# Altium PCB BSafePCB.PcbDoc
Units mil, origin at the board's own origin, x right, y up, seen from the top; angles counter-clockwise.
Board outline 3430 x 2198 mil, 2 copper layers (Top Layer, Bottom Layer); 48 components, 47 nets, 230 pads, 40 vias.
Unrouted connection lines stored in the file: 12.
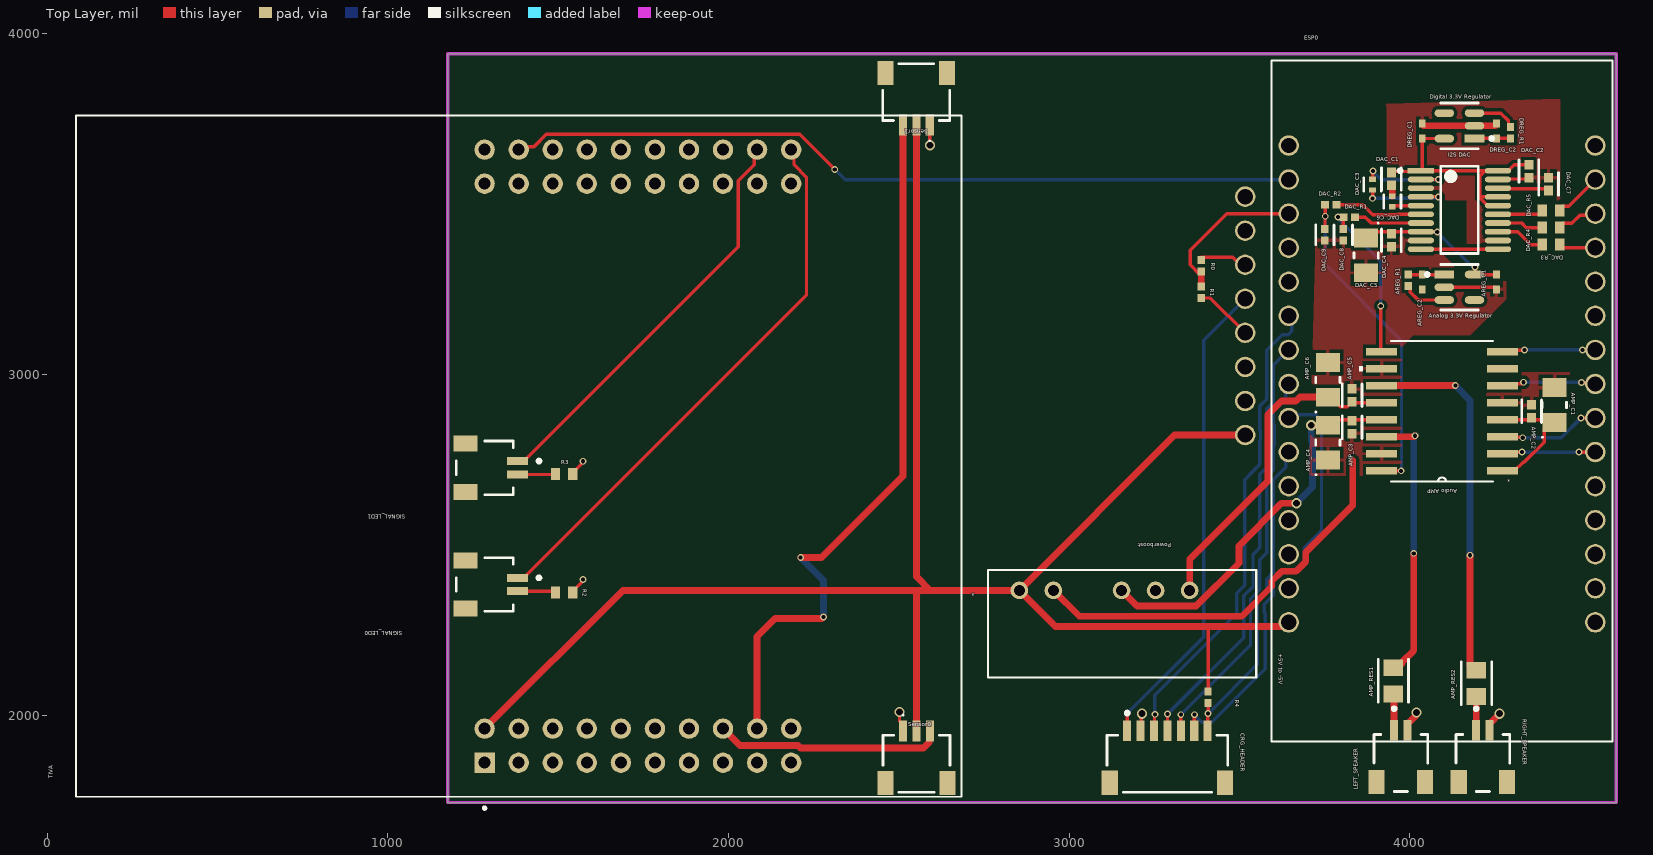
[diagram p0: Top Layer view]
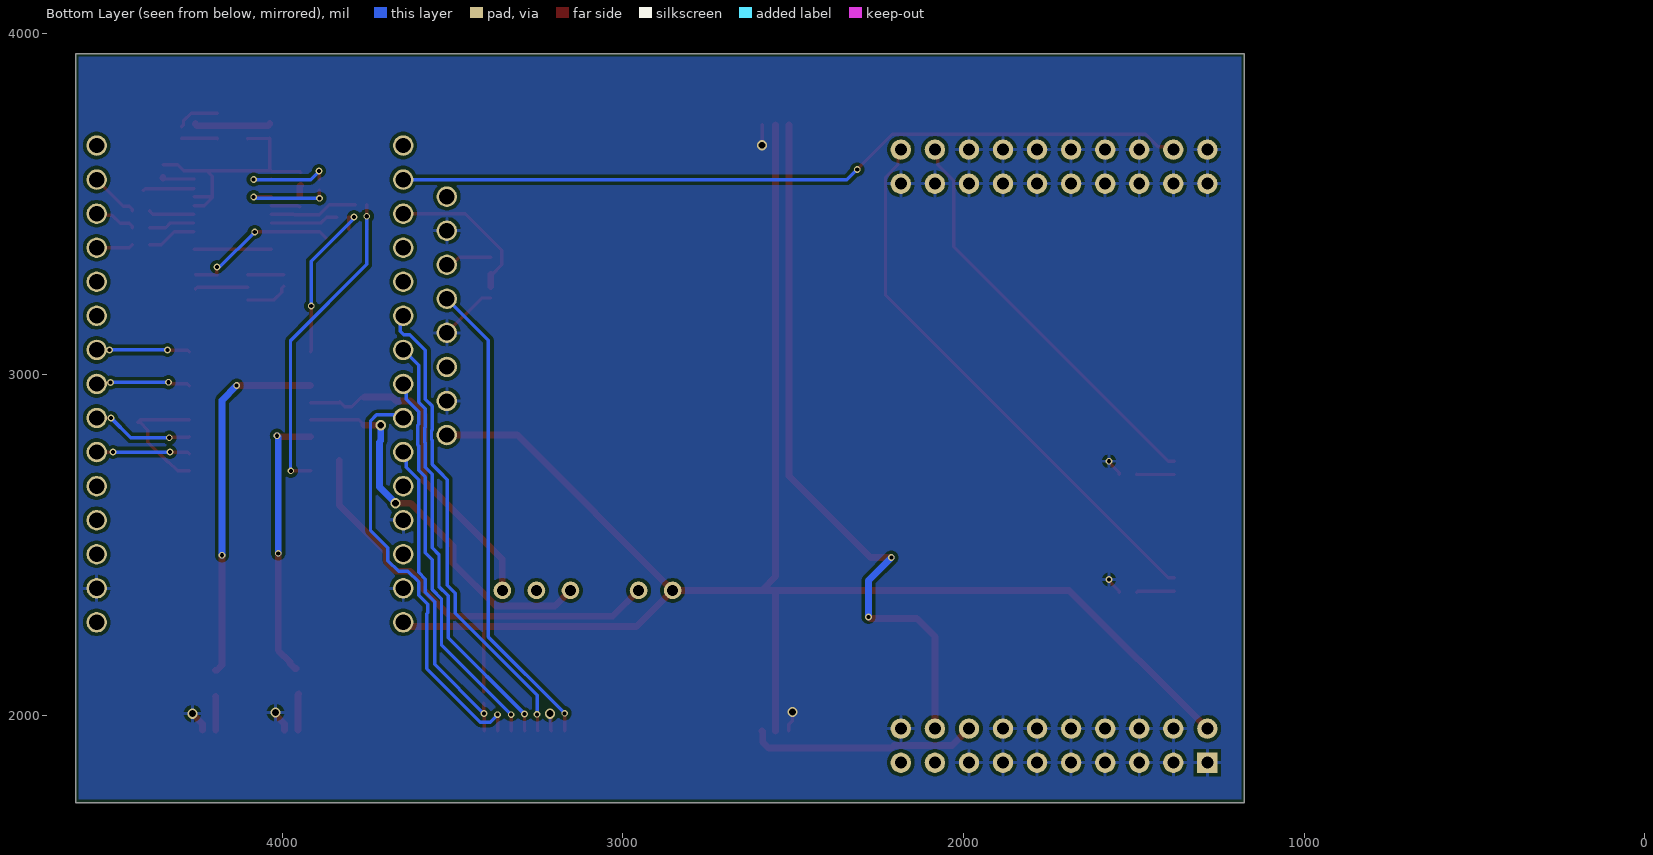
[diagram p1: Bottom Layer view, seen from below]
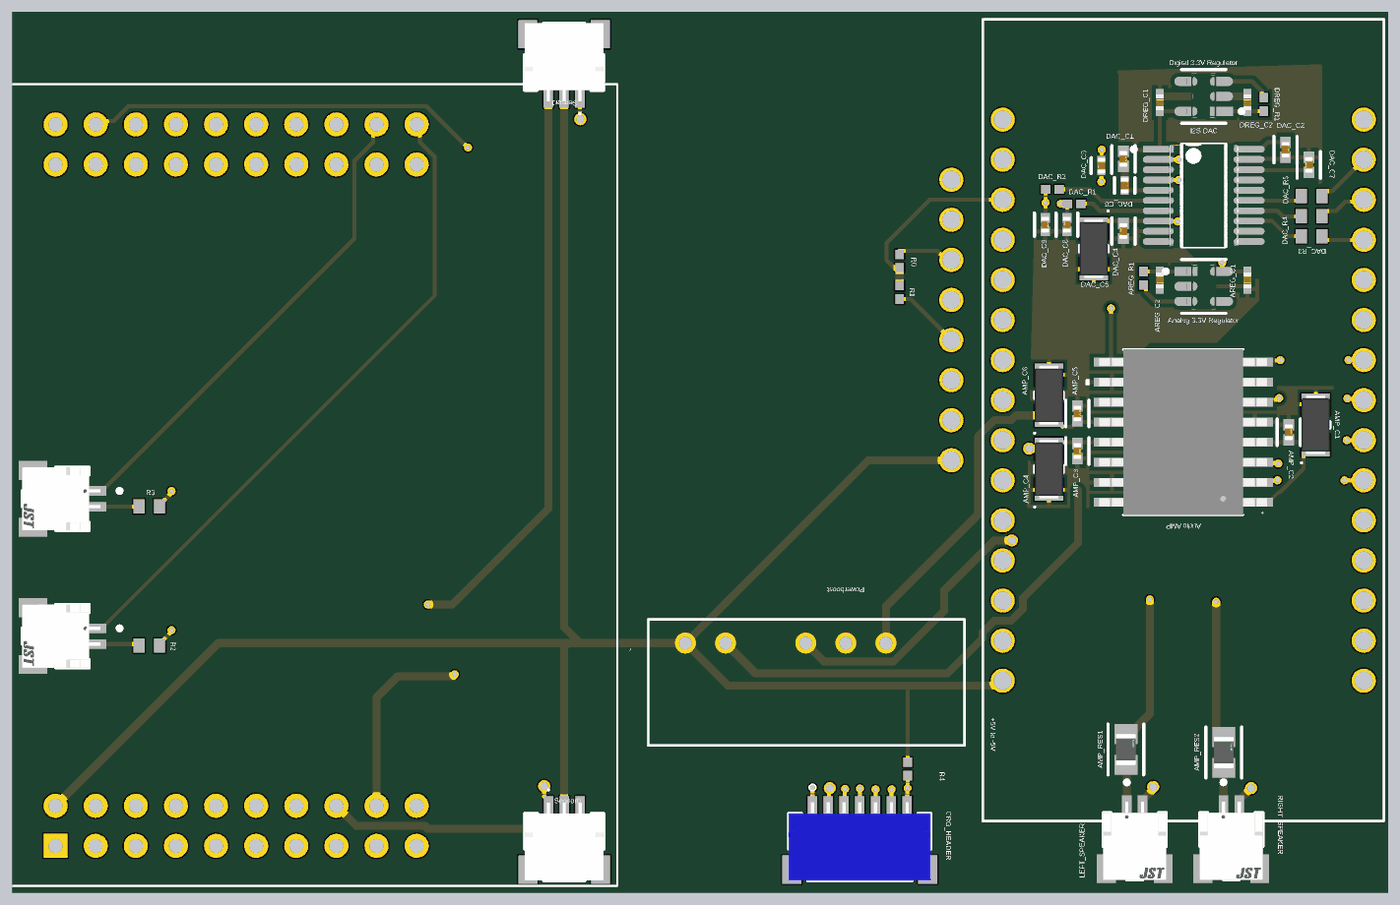
[diagram p2: 3D render of the assembled board from above, using the file's embedded part models]

## Layer stack, top to bottom
Top Solder: solder mask 0.4, Solder Resist, Dk 3.5
Top Layer: signal copper 1.4
Dielectric 1: dielectric 12.6, FR-4, Dk 4.8
Bottom Layer: signal copper 1.4
Bottom Solder: solder mask 0.4, Solder Resist, Dk 3.5

## Board outline
1176,1743 4606,1743 4606,3941 1176,3941

## Design rules (kind name [scope] priority, off if disabled: settings)
Clearance Clearance_1 [All] p1: gap=10 ignorepadtopadclearanceinfootprint=TRUE
Clearance [All] p2: gap=10 ignorepadtopadclearanceinfootprint=TRUE except(0: Arc-Hole Track-Hole SMDPad-Hole THPad-Hole Via-Hole Fill-Hole Poly-Hole Region-Hole Text-Hole)
PolygonConnect [All] p1: connectstyle=Relief reliefconductorwidth=10 reliefentries=4 polygonreliefangle="90 Angle" airgapwidth=10
RoutingVias [All] p1: holewidth=12 width=20 viastyle="Through Hole" minholewidth=12 minwidth=20 maxholewidth=28 maxwidth=50
SolderMaskExpansion [All] p1: expansion=4 istentingtop=FALSE
Width [All] p1: maxlimit=20 minlimit=10 preferedwidth=10
30 further rules are at their usual default settings.

## Classes and differential pairs
component class PGA: "+5V to -5V" AMP_C1 AMP_C2 AMP_C3 AMP_C4 AMP_C5 AMP_C6 AMP_RES1 AMP_RES2 "Audio AMP" LEFT_SPEAKER RIGHT_SPEAKER z
component class PCM: "Analog 3.3V Regulator" AREG_C1 AREG_C2 AREG_R1 DAC_C1 DAC_C2 DAC_C3 DAC_C4 DAC_C5 DAC_C6 DAC_C7 DAC_C8 DAC_C9 DAC_R1 DAC_R2 DAC_R3 DAC_R4 DAC_R5 "Digital 3.3V Regulator" DREG_C1 DREG_C2 DREG_R1 "I2S DAC" z
component class MAIN_SCH: CRG_HEADER ESP0 Powerboost R0 R1 R2 R3 R4 Sensor0 Sensor1 SIGNAL_LED0 SIGNAL_LED1 TIVA z

## Components (designator, comment, footprint, x,y, rotation, side; value= is the part's Value field where it differs from the comment)
"+5V to -5V" "TMH0505D" "TMH DUAL_TRP" 2854,2366 r0 top
AMP_C1 "TAJA106K016RNJ" CAPMP3217X18-T_V 4425,2910.18 r90 top locked value=10µF
AMP_C2 "CL05A104KA5NNNC" FP-CL278-IPC_A 4358,2891.84 r90 top locked value=100nF
AMP_C3 "CL05A104KA5NNNC" FP-CL278-IPC_A 3831,2845 r90 top locked value=100nF
AMP_C4 "TAJA106K016RNJ" CAPMP3217X18-T_V 3760,2799.82 r90 top locked value=10µF
AMP_C5 "CL05A104KA5NNNC" FP-CL278-IPC_A 3831,2938.84 r90 top locked value=100nF
AMP_C6 "TAJA106K016RNJ" CAPMP3217X18-T_V 3760,2984.18 r90 top locked value=10µF
AMP_RES1 "ESR10EZPJ560" FP-ESR10-IPC_A 3952,2100.46 r270 top value=56
AMP_RES2 "ESR10EZPJ560" FP-ESR10-IPC_A 4196,2093 r270 top value=56
"Analog 3.3V Regulator" "MIC5504-3.3YM5-TR" FP-SOT23-5LD-PL-1-IPC_B 4146,3255.87 r0 top locked
AREG_C1 "1uF 0402 Ceramic" CAP_CL05_SAM 4255,3271.11 r90 top locked value=1µF
AREG_C2 "1uF 0402 Ceramic" CAP_CL05_SAM 4037,3271.11 r90 top locked value=1µF
AREG_R1 "RC0402FR-07220KL" RESC1005X40X25NL05T10 3996,3276.14 r90 top locked
"Audio AMP" "PGA2311U" DW16 4095,2892 r180 top locked
CRG_HEADER "SM07B-SRSS-TB(LF)(SN)" JST-SM07B-SRSS-TB_V 3288.71,1877.28 r0 top
DAC_C1 "CL05A104KA5NNNC" FP-CL278-IPC_A 3946,3573.87 r90 top locked value=100nF
DAC_C2 "CL05A104KA5NNNC" FP-CL278-IPC_A 4350,3596.71 r90 top locked value=100nF
DAC_C3 "GRM155R61A225KE01J" FP-GRM155-0_05-MFG 3891,3557.12 r270 top locked value=2.2µF
DAC_C4 "CL05A104KA5NNNC" FP-CL278-IPC_A 3946,3394.03 r270 top locked value=100nF
DAC_C5 "TAJA106K016RNJ" CAPMP3217X18-T_V 3872,3349.69 r270 top locked value=10µF
DAC_C6 "GRM155R61A225KE01J" FP-GRM155-0_05-MFG 3949,3507.62 r90 top locked value=2.2µF
DAC_C7 "CL05A104KA5NNNC" FP-CL278-IPC_A 4408,3558.87 r270 top locked value=100nF
DAC_C8 "CL05B222JB5NNNC" FP-CL316-IPC_B 3805,3409.87 r270 top locked value=2.2nF
DAC_C9 "CL05B222JB5NNNC" FP-CL316-IPC_B 3751,3409.87 r90 top locked value=2.2nF
DAC_R1 "RC0402FR-07470RL" RESC1005X40X25NL05T10 3822.73,3461.87 r180 top locked
DAC_R2 "RC0402FR-07470RL" RESC1005X40X25NL05T10 3768.73,3497.87 r180 top locked
DAC_R3 "RK73B1JTTD221J" RESC1608X55X30LL20T10 4415,3380.87 r180 top locked value=220
DAC_R4 "RK73B1JTTD221J" RESC1608X55X30LL20T10 4415,3430.87 r180 top locked value=220
DAC_R5 "RK73B1JTTD221J" RESC1608X55X30LL20T10 4415,3480.87 r180 top locked value=220
"Digital 3.3V Regulator" "MIC5504-3.3YM5-TR" FP-SOT23-5LD-PL-1-IPC_B 4146,3729.87 r180 top locked
DREG_C1 "1uF 0402 Ceramic" CAP_CL05_SAM 4037,3714.64 r270 top locked value=1µF
DREG_C2 "1uF 0402 Ceramic" CAP_CL05_SAM 4255,3714.64 r270 top locked value=1µF
DREG_R1 "RC0402FR-07220KL" RESC1005X40X25NL05T10 4296,3709.87 r270 top locked
ESP0 "ESP-32-BB" ESP-32-BB-Footprint-1 3645,3672 r0 top
"I2S DAC" "PCM5102APWR" FP-PW0020A-IPC_A 4146,3482.87 r0 top locked
LEFT_SPEAKER "SM02B-SRSS-TB(LF)(SN)" FP-SM02B-SRSS-TB_LF_SN-0 3974,1859 r0 top
Powerboost "Powerboost 500c" "Powerboost 500c-Footprint-1" 3517,3522 r270 top locked
R0 "RC0402FR-07220KL" RESC1005X40X25NL05T10 3388,3319 r270 top value=220k
R1 "RC0402FR-0747KL" RESC1005X40X25NL05T10 3388,3241 r270 top value=47k
R2 "RK73B1JTTD221J" RESC1608X55X30LL20T10 1517.59,2360 r0 top value=220
R3 "RK73B1JTTD221J" RESC1608X55X30LL20T10 1517.59,2707 r0 top value=220
R4 "RC0402FR-0747KL" RESC1005X40X25NL05T10 3408,2052 r270 top value=47k
RIGHT_SPEAKER "SM02B-SRSS-TB(LF)(SN)" FP-SM02B-SRSS-TB_LF_SN-0 4214.87,1859.1 r0 top
Sensor0 "SM03B-SRSS-TB(LF)(SN)" JST-SM03B-SRSS-TB_V 2552,1857 r0 top
Sensor1 "SM03B-SRSS-TB(LF)(SN)" JST-SM03B-SRSS-TB_V 2551.55,3828.9 r180 top
SIGNAL_LED0 "SM02B-SRSS-TB(LF)(SN)" FP-SM02B-SRSS-TB_LF_SN-0 1284.1,2383.13 r270 top
SIGNAL_LED1 "SM02B-SRSS-TB(LF)(SN)" FP-SM02B-SRSS-TB_LF_SN-0 1284.1,2725.87 r270 top
TIVA "EK-TM4C123GXL" EK-TM4C123GXL-Footprint-1 1284,1860 r90 top locked

## Footprints (in the part's own frame and the unit in brackets; to place one, negate y for a bottom-side part, rotate by r counter-clockwise, add the part's x,y. Pads: shape width x height; smd on the part's side, far side on the other; paste and mask are expansions set on the pad)
CAP_CL05_SAM [mm]
  rect 0.606x0.5 smd paste+0 mask+0: 1(-0.553,0) 2(0.553,0)
  body extent -0.5,-0.25 0.5,0.25, height 0.55
CAPMP3217X18-T_V [mm] "Molded Capacitor, 2-Leads, Body 3.40x1.8mm"
  rect 1.4x1.8 smd: 1(-1.3,0) 2(1.3,0)
  silkscreen extent -2.45,-0.9 0.2,0.95, body extent -1.92,-0.9 1.92,0.9, height 1.8
DW16 [mil]
  rect 91x22 smd paste+0 mask+0: 1(-178,175) 2(-178,125) 3(-178,75) 4(-178,25) 5(-178,-25) 6(-178,-75) 7(-178,-125) 8(-178,-175) 9(178,-175) 10(178,-125) 11(178,-75) 12(178,-25) 13(178,25) 14(178,75) 15(178,125) 16(178,175)
  silkscreen extent -150,-207 244,207, body extent -209,-206 209,206, height 104
EK-TM4C123GXL-Footprint-1 [mm]
  rect 1.52x1.52 hole 0.89: J1_1(0,0)
  round 1.52 hole 0.89: J1_2(0,-2.54) J1_3(0,-5.08) J1_4(0,-7.62) J1_5(0,-10.16) J1_6(0,-12.7) J1_7(0,-15.24) J1_8(0,-17.78) J1_9(0,-20.32) J1_10(0,-22.86) J2_1(45.72,0) J2_2(45.72,-2.54) J2_3(45.72,-5.08) J2_4(45.72,-7.62) J2_5(45.72,-10.16) J2_6(45.72,-12.7) J2_7(45.72,-15.24) J2_8(45.72,-17.78) J2_9(45.72,-20.32) J2_10(45.72,-22.86) J3_1(2.54,0) J3_2(2.54,-2.54) J3_3(2.54,-5.08) J3_4(2.54,-7.62) J3_5(2.54,-10.16) J3_6(2.54,-12.7) J3_7(2.54,-15.24) J3_8(2.54,-17.78) J3_9(2.54,-20.32) J3_10(2.54,-22.86) J4_1(43.18,0) J4_2(43.18,-2.54) J4_3(43.18,-5.08) J4_4(43.18,-7.62) J4_5(43.18,-10.16) J4_6(43.18,-12.7) J4_7(43.18,-15.24) J4_8(43.18,-17.78) J4_9(43.18,-20.32) J4_10(43.18,-22.86)
  silkscreen extent -3.49,-35.56 48.26,30.48, body extent -5.97,-35.56 52.45,30.48, height 25.4
ESP-32-BB-Footprint-1 [mil]
  round 60 hole 45: 1(0,0) 2(0,-100) 3(0,-200) 4(0,-300) 5(0,-400) 6(0,-500) 7(0,-600) 8(0,-700) 9(0,-800) 10(0,-900) 11(0,-1000) 12(0,-1100) 13(0,-1200) 14(0,-1300) 15(0,-1400) 16(900,-1400) 17(900,-1300) 18(900,-1200) 19(900,-1100) 20(900,-1000) 21(900,-900) 22(900,-800) 23(900,-700) 24(900,-600) 25(900,-500) 26(900,-400) 27(900,-300) 28(900,-200) 29(900,-100) 30(900,0)
  silkscreen extent -50,-1750 950,250, body extent -50,-1750 950,250, height 488
FP-CL278-IPC_A [mil]
  rect 28.16x26.48 smd paste+0 mask+0: 1(-18.84,0) 2(18.84,0)
  silkscreen extent -33,-29 33,29, body extent -41,-21 41,21, height 10
FP-CL316-IPC_B [mil]
  rect 24.23x22.54 smd paste+0 mask+0: 1(-16.87,0) 2(16.87,0)
  silkscreen extent -29,-27 29,27, body extent -35,-17 35,17, height 10
FP-ESR10-IPC_A [mil]
  rect 49.53x57.56 smd paste+0 mask+0: 1(-38.46,0) 2(38.46,0)
  silkscreen extent -63,-45 63,45, body extent -83,-48 83,48, height 10
FP-GRM155-0_05-MFG [mm]
  rect 0.4x0.5 smd paste+0 mask+0: 1(-0.4,0) 2(0.4,0)
  silkscreen extent -0.5,-0.65 0.5,0.65, body extent -0.7,-0.38 0.7,0.38, height 0.25
FP-PW0020A-IPC_A [mm]
  rect 1.955x0.421 smd paste+0 mask+0: 1(-2.875,2.925)
  rrect100% 1.955x0.421 smd paste+0 mask+0: 2(-2.875,2.275) 3(-2.875,1.625) 4(-2.875,0.975) 5(-2.875,0.325) 6(-2.875,-0.325) 7(-2.875,-0.975) 8(-2.875,-1.625) 9(-2.875,-2.275) 10(-2.875,-2.925) 11(2.875,-2.925) 12(2.875,-2.275) 13(2.875,-1.625) 14(2.875,-0.975) 15(2.875,-0.325) 16(2.875,0.325) 17(2.875,0.975) 18(2.875,1.625) 19(2.875,2.275) 20(2.875,2.925)
  silkscreen extent -4.55,-3.25 1.4,3.25, body extent -4.35,-3.75 4.35,3.75, height 0.25
FP-SM02B-SRSS-TB_LF_SN-0 [mm]
  rect 0.6x1.55 smd paste+0 mask+0: 1(-0.5,2.45) 2(0.5,2.45)
  rect 1.2x1.8 smd paste+0 mask+0: 3(-1.8,-1.425) 4(1.8,-1.425)
  silkscreen extent -2,-2.12 2,4.17, body extent -2.5,-2.42 2.5,3.32, height 0.25
FP-SOT23-5LD-PL-1-IPC_B [mm]
  rect 1.456x0.57 smd paste+0 mask+0: 1(-1.125,0.95)
  rrect100% 1.456x0.57 smd paste+0 mask+0: 2(-1.125,0) 3(-1.125,-0.95) 4(1.125,-0.95) 5(1.125,0.95)
  silkscreen extent -2.53,-1.7 1.4,1.7, body extent -2.1,-1.7 2.1,1.7, height 0.25
JST-SM03B-SRSS-TB_V [mm] "SMD, 3-Leads, Body 5x4.25mm, Pitch 1mm"
  rect 0.6x1.55 smd: 1(-1,2.45) 2(0,2.45) 3(1,2.45)
  rect 1.2x1.8 smd: MP1(-2.3,-1.425) MP2(2.3,-1.425)
  silkscreen extent -2.5,-2.12 2.5,3.67, body extent -2.5,-2.12 2.5,2.83, height 3.25
JST-SM07B-SRSS-TB_V [mm] "SMD, 7-Leads, Body 9x4.25mm, Pitch 1mm"
  rect 0.6x1.55 smd: 1(-3,1.938) 2(-2,1.938) 3(-1,1.938) 4(0,1.938) 5(1,1.938) 6(2,1.938) 7(3,1.938)
  rect 1.2x1.8 smd: MP1(-4.3,-1.937) MP2(4.3,-1.937)
  silkscreen extent -4.5,-2.64 4.5,3.39, body extent -4.5,-2.64 4.5,2.31, height 2.96
"Powerboost 500c-Footprint-1" [mil]
  round 60 hole 45: 1(0,0) 2(100,0) 3(200,0) 4(300,0) 5(400,0) 6(500,0) 7(600,0) 8(700,0)
  body extent -400,-800 1000,50, height 550
RESC1005X40X25NL05T10 [mm] "Chip Resistor, 2-Leads, Body 1.00x0.50mm, IPC Medium Density"
  rect 0.6x0.55 smd: 1(-0.425,0) 2(0.425,0)
  body extent -0.53,-0.27 0.53,0.28, height 0.4
RESC1608X55X30LL20T10 [mm] "Chip Resistor, 2-Leads, Body 1.60x0.80mm, IPC High Density"
  rect 0.7x0.9 smd: 1(-0.65,0) 2(0.65,0)
  body extent -0.9,-0.5 0.9,0.5, height 0.55
"TMH DUAL_TRP" [mil]
  round 52 / inner round 60 / far side round 52 hole 32 paste-99999 mask+0: 1(0,0) 2(100,0) 4(300,0) 5(400,0) 6(500,0)
  silkscreen extent -92,-256 696,59, body extent -95,-260 700,60, height 400

## Part data
"+5V to -5V": library part CMP-019-00049-2, "DC-DC Regulated Power Supply Module, 2 Output, 2W, Hybrid", Max Operating Temperature=85°C, Min Operating Temperature=-40°C, RoHS Compliant=Yes
AMP_C1 AMP_C4 AMP_C6 DAC_C5: library part CMP-001-00041-7, "Standard Tantalum, 10 uF, +/- 10%, 16 V, -55 to 125 degC, 1206 (3216 Metric), RoHS, Tape and Reel", Capacitor Type=Tantalum, Case/Package=1206, Manufacturer=AVX, Max Operating Temperature=125°C, Min Operating Temperature=-55°C, Package Description="2-Pin Surface Mount Device, Body 3.2 x 1.65 mm", Package Quantity=1, Package Reference=CAPMP3217X18-T, Tolerance=10%, Voltage Rating=16V, Datasheet URL=http://datasheets.avx.com/TAJ.pdf, Datasheet Version=Feb-16, ESR=3Ohm, Manufacturer URL=http://www.avx.com/, Mounting Technology=SM, Package URL=http://www.avx.com/download/software/literature/AVX-Footprint-Library.pdf, Packaging=TapeandReel, Pins=2, RoHS Compliant=True
AMP_C2 AMP_C3 AMP_C5 DAC_C1 DAC_C2 DAC_C4 DAC_C7: library part CMP-001-00088-2, "Ceramic Capacitor, Multilayer, Ceramic, 25V, 10% +Tol, 10% -Tol, X5R, 15% TC, 0.1uF, Surface Mount, 0402, 0.1uF cap", Capacitor Type=Ceramic, Max Operating Temperature=85°C, Min Operating Temperature=-55°C, RoHS Compliant=Yes
AMP_RES1 AMP_RES2: library part CMP-009-00182-1, "Fixed Resistor, Metal Glaze/thick Film, 0.4W, 56ohm, 150V, 5% +/-Tol, 200ppm/Cel, Surface Mount, 0805", Max Operating Temperature=155°C, Min Operating Temperature=-55°C, Tolerance=5%, RoHS Compliant=Yes
"Analog 3.3V Regulator" "Digital 3.3V Regulator": library part CMP-019-00050-1, "Fixed Positive LDO Regulator, 3.3V, 0.38V Dropout, CMOS, PDSO5, use this one", RoHS Compliant=Yes
AREG_C1 AREG_C2 DREG_C1 DREG_C2: library part CMP-001-00089-6, "CL05A105KO5NNNC, Samsung, Ceramic CAP", Mfr_Name=Samsung, Design Item ID=CL05A105KO5NNNC, Source=CL05A105KO5NNNC.SchLib
AREG_R1 DREG_R1: library part CMP-009-00179-1, "Fixed Resistor, Metal Glaze/thick Film, 0.0625W, 220000ohm, 50V, 1% +/-Tol, 100ppm/Cel, Surface Mount, 0402", Max Operating Temperature=155°C, Min Operating Temperature=-55°C, Tolerance=1%, RoHS Compliant=Yes
"Audio AMP": library part CMP-005-000000-2, "No Description Available", Mfr_Name="Texas Instruments", Design Item ID=PGA2311U, RefDes=RefDes, Source=PGA2311U.SchLib, Type=Type
CRG_HEADER: library part CMP-002-00071-1, "CONN HEADER SH 7POS SIDE 1MM TIN", Pins=7
DAC_C3 DAC_C6: library part CMP-001-00090-1, "Ceramic Capacitor, Multilayer, Ceramic, 10V, 10% +Tol, 10% -Tol, X5R, 15% TC, 2.2uF, Surface Mount, 0402"
DAC_C8 DAC_C9: library part CMP-001-00087-2, "Ceramic Capacitor, Multilayer, Ceramic, 50V, 5% +Tol, 5% -Tol, X7R, 15% TC, 0.0022uF, Surface Mount, 0402, 2.2nF cap", Capacitor Type=Ceramic, Max Operating Temperature=125°C, Min Operating Temperature=-55°C, RoHS Compliant=Yes
DAC_R1 DAC_R2: library part CMP-009-00181-1, "Fixed Resistor, Metal Glaze/thick Film, 0.0625W, 470ohm, 50V, 1% +/-Tol, 100ppm/Cel, Surface Mount, 0402", Max Operating Temperature=155°C, Min Operating Temperature=-55°C, Tolerance=1%, RoHS Compliant=Yes
DAC_R3 DAC_R4 DAC_R5 R2 R3: library part CMP-009-00180-2, "Fixed Resistor, Metal Glaze/thick Film, 0.125W, 220ohm, 75V, 5% +/-Tol, 200ppm/Cel, Surface Mount, 0603", Max Operating Temperature=155°C, Min Operating Temperature=-55°C, Tolerance=5%, RoHS Compliant=Yes
ESP0: library part CMP-00001-11, "Breakoutboard for ESP-32-BB"
"I2S DAC": library part CMP-00027-00004-1, "D/A Converter, 1 Func, Serial Input Loading, PDSO20", Max Operating Temperature=85°C, Min Operating Temperature=-25°C, RoHS Compliant=Yes
LEFT_SPEAKER RIGHT_SPEAKER SIGNAL_LED0 SIGNAL_LED1: library part CMP-002-00072-1, "CONN HEADER SH 2POS SIDE 1MM TIN", Pins=2
Powerboost: library part CMP-00002-5, "Breakout board component for Adafruit Powerboost 500c"
R0: library part CMP-009-00179-2, "Fixed Resistor, Metal Glaze/thick Film, 0.0625W, 220000ohm, 50V, 1% +/-Tol, 100ppm/Cel, Surface Mount, 0402", Max Operating Temperature=155°C, Min Operating Temperature=-55°C, Tolerance=1%, RoHS Compliant=Yes
R1 R4: library part CMP-009-00178-2, "Fixed Resistor, Metal Glaze/thick Film, 0.0625W, 47000ohm, 50V, 1% +/-Tol, 100ppm/Cel, Surface Mount, 0402", Max Operating Temperature=155°C, Min Operating Temperature=-55°C, Tolerance=1%, RoHS Compliant=Yes
Sensor0 Sensor1: library part CMP-002-00074-1, "CONN HEADER SH 3POS SIDE 1MM TIN", Pins=3
TIVA: library part CMP-012-000000-3, "ARMÂ® CortexÂ®-M4F Based MCU TM4C123G LaunchPadâ„¢ Evaluation Kit", Package=None, Availability=Warning, Check_prices=https://www.snapeda.com/parts/EK-TM4C123GXL/Texas%20Instruments/view-part/132968/?ref=eda, Component Type=Standard, Design Item ID=EK-TM4C123GXL, MF="Texas Instruments", MP=EK-TM4C123GXL, Pin Count=40, Price=None, Purchase-URL=https://pricing.snapeda.com/search/part/EK-TM4C123GXL/?ref=eda, SnapEDA_Link=https://www.snapeda.com/parts/EK-TM4C123GXL/Texas%20Instruments/view-part/132968/?ref=snap, Source=EK-TM4C123GXL.SchLib

## Via types
v1: diameter 20, hole 12, Top Layer to Bottom Layer, 33 vias
v2: diameter 30, hole 20, Top Layer to Bottom Layer, 7 vias

## Nets (pads, with @x,y where several pads share a name; then routed paths per layer and width w, separated by ;. In a path a pad name is that pad's centre, name@x,y a point inside that pad or via, vN(x,y) a via of type N, cw(c..) or ccw(c..) an arc to the next point about the centre after c; other vN are vias at no path point)
5V: "+5V to -5V.1" "Audio AMP.1" "Audio AMP.4" "Digital 3.3V Regulator.1" AMP_C1.1 AMP_C2.1 DREG_C2.2 DREG_R1.2 ESP0.1 ESP0.15 Powerboost.8 R4.1 Sensor0.2 Sensor1.2 TIVA.J3_1 | length 5914.6
  Top Layer w10: R4.1 3408,2257 3411,2260 ; 4190.3,3692.47 4190.64,3692.81 4295.67,3692.81 DREG_R1.2 ; 4273,2717 4307.5,2717 4332.82,2742.32 4335.68,2742.32 4394.57,2801.21 4394.57,2836.44 4417.13,2859 AMP_C1.1 4417,2867 4273,2867
  Top Layer w20: TIVA.J3_1 1690,2366 2561,2366 ; Sensor1.2 2551.55,2406.45 2592,2366 ; Sensor0.2 2552,2357 2561,2366 ; Powerboost.8 3310,2822 2854,2366 ; ESP0.15 3634.18,2272 3622.18,2260 3411,2260 2960,2260 2854,2366 ; 2561,2366 2592,2366 ; 2592,2366 2854,2366
A3.3V: "Analog 3.3V Regulator.5" "I2S DAC.8" AREG_C1.2 DAC_C4.1 DAC_C5.1 | length 457.6
  Top Layer w10: DAC_C5.1 3890.02,3418.9 3946,3418.9 4032.8,3418.9 4033.24,3418.45 4080.55,3418.45 v1(4081,3418) ; v1(4192,3315) 4192,3294.57 4190.5,3293.07 4254.8,3293.07 AREG_C1.2
  Bottom Layer w10: v1(4081,3418) 4183.04,3315.96 4191.04,3315.96 v1(4192,3315)
A+5: "Analog 3.3V Regulator.1" AREG_C2.2 AREG_R1.2 | length 105.9
  Top Layer w10: AREG_R1.2 3996.2,3293.07 4101.5,3293.07 4101.7,3293.27
A+5V: "+5V to -5V.6" "Audio AMP.12" AMP_C5.1 AMP_C6.1 | length 984.2
  Top Layer w10: AMP_C6.1 3767.87,2933 3795.74,2905.13 3816.13,2905.13 3821.92,2910.92 3822.76,2910.92 3831,2919.16 AMP_C5.1 ; AMP_C5.1@3831,2917 3917,2917
  Top Layer w20: 3354,2366 3354,2457 3584,2687 3584,2881.71 3624.29,2922 3665.71,2922 3677.71,2934 3759,2934 AMP_C6.1
A-5V: "+5V to -5V.4" "Audio AMP.13" AMP_C3.2 AMP_C4.2 | length 1150.6
  Top Layer w10: AMP_C4.2 3776,2867 3917,2867
  Top Layer w20: 3154,2366 3200,2320 3373.05,2320 3498.67,2445.62 3498.67,2496.38 3624.29,2622 v2(3667.91,2622) ; v2(3711,2851) AMP_C4.2
  Bottom Layer w20: v2(3667.91,2622) 3715,2669.09 3715,2800.99 3711,2804.99 v2(3711,2851)
AGND: "+5V to -5V.2" "Analog 3.3V Regulator.2" "Audio AMP.10" "Audio AMP.15" "I2S DAC.9" AMP_C3.1 AMP_C4.1 AMP_C5.2 AMP_C6.2 AREG_C1.1 AREG_C2.1 DAC_C4.2 DAC_C5.2 DAC_C8.2 DAC_C9.1 | length 1357.8
  Top Layer w10: 4101.7,3255.87 4250.16,3255.87 4255,3251.03 AREG_C1.1
  Top Layer w20: 2954,2366 3030,2290 3507,2290 3595,2378 3595,2392.71 3624.29,2422 3665.71,2422 3695,2451.29 3695,2478 3833,2616 3833,2747
AMP_CS: "Audio AMP.2" ESP0.21 | length 274.1
  Top Layer w10: 4273,2767 4277.04,2771.04 4329.04,2771.04 v1(4330,2772) ; v1(4497,2772) ESP0.21
  Bottom Layer w10: v1(4330,2772) v1(4497,2772)
AMP_DATA: "Audio AMP.3" ESP0.22 | length 297.3
  Top Layer w10: 4273,2817 4275.04,2814.96 4331.04,2814.96 v1(4332,2814) ; v1(4503,2872) ESP0.22
  Bottom Layer w10: v1(4332,2814) 4445,2814 v1(4503,2872)
AMP_IN_L: "Audio AMP.16" DAC_C9.2 DAC_R2.2 | length 970.2
  Top Layer w10: DAC_C9.2 3751.5,3427.25 3751.5,3464 v1(3752,3464.5) DAC_R2.2 ; 3917,2717 v1(3975,2717)
  Bottom Layer w10: v1(3752,3464.5) 3752,3322.99 3976,3098.99 3976,2721.54 3975.96,2721.49 3975.96,2717.96 v1(3975,2717)
AMP_IN_R: "Audio AMP.9" DAC_C8.1 DAC_R1.2 | length 499.1
  Top Layer w10: v1(3789.91,3461.87) DAC_R1.2 3805.5,3461.37 3805.5,3427.24 DAC_C8.1 ; v1(3915,3201) 3915,3069 3917,3067
  Bottom Layer w10: v1(3789.91,3461.87) 3789.91,3457.09 3915,3332 v1(3915,3201)
AMP_MUTE: "Audio AMP.8" ESP0.24 | length 277.6
  Top Layer w10: 4273,3067 4277.04,3071.04 4336.04,3071.04 v1(4337,3072) ; v1(4507,3072) ESP0.24 ESP0.24@4542.5,3069.5
  Bottom Layer w10: v1(4337,3072) v1(4507,3072)
AMP_OUT_L: "Audio AMP.14" AMP_RES1.1 | length 809.3
  Top Layer w20: 3917,2817 4013,2817 v1(4016,2820) ; AMP_RES1.1@3959,2136.93 3963.02,2136.93 3977.78,2151.7 3977.78,2155.71 4012,2189.93 v1(4012,2474.7)
  Bottom Layer w20: v1(4012,2474.7) 4012,2816 v1(4016,2820)
AMP_OUT_R: "Audio AMP.11" AMP_RES2.1 | length 1080.6
  Top Layer w20: 3917,2967 v1(4134,2967) ; v1(4177,2469) 4177,2150.46 4177.22,2150.25 4177.22,2146.23 4191.98,2131.46 AMP_RES2.1
  Bottom Layer w20: v1(4134,2967) 4177,2924 v1(4177,2469)
AMP_SCK: "Audio AMP.6" ESP0.23 | length 278.2
  Top Layer w10: 4273,2967 4279,2973 4328.65,2973 4332.65,2977 v1(4334,2977) ; v1(4504,2976) 4504.96,2975.04 4541.96,2975.04 ESP0.23
  Bottom Layer w10: v1(4334,2977) 4334.5,2976.5 4503.5,2976.5 v1(4504,2976)
BAT: Powerboost.3 R0.1 | length 138.4
  Top Layer w10: R0.1@3388,3344.59 3480.88,3344.59 3503.47,3322 Powerboost.3
CRASH: ESP0.2 TIVA.J2_2 | length 2335.1
  Top Layer w10: TIVA.J2_2 1392.45,3668.45 1428.92,3668.45 1465.39,3704.92 2209.08,3704.92 v1(2312,3602)
  Bottom Layer w10: v1(2312,3602) 2342.5,3571.5 3644.5,3571.5 ESP0.2
CRG0: CRG_HEADER.6 ESP0.9 | length 1250.7
  Top Layer w10: CRG_HEADER.6 3367.72,1953.83 3367.72,2000.72 v1(3368,2001)
  Bottom Layer w10: v1(3368,2001) 3390,1979 3418.36,1979 3575.78,2136.43 3575.78,2296.79 3572.71,2299.86 3572.71,2324.71 3600,2352 3600,2390.64 3631.36,2422 3658.64,2422 3690,2453.36 3690,2490.64 3741,2541.64 3741,2863.43 3723.43,2881 3654,2881 ESP0.9
CRG1: CRG_HEADER.5 ESP0.8 | length 1151.4
  Top Layer w10: v1(3328,2001) v1(3328,2001) 3328.04,1953.6 CRG_HEADER.5
  Bottom Layer w10: v1(3328,2001) 3532.71,2205.71 3532.71,2341.28 3560,2368.57 3560,2455.96 3580,2475.96 3580,2698.92 3600,2718.92 3600,2790.64 3602,2792.64 3602,2851.36 3600,2853.36 3600,2890.64 3636.36,2927 3636.36,2963.36 ESP0.8
CRG2: CRG_HEADER.4 ESP0.7 | length 1267.7
  Top Layer w10: CRG_HEADER.4 3288.85,1953.7 3288.85,2002.85 v1(3289,2003)
  Bottom Layer w10: v1(3289,2003) 3512.71,2226.71 3512.71,2349.57 3540,2376.85 3540,2470.6 3560,2490.6 3560,2707.21 3580,2727.21 3580,2798.92 3582,2800.92 3582,2843.08 3580,2845.08 3580,2898.92 3600,2918.92 3600,3027 ESP0.7
CRG3: CRG_HEADER.3 ESP0.6 | length 1401.3
  Top Layer w10: CRG_HEADER.3 3250.67,1954.89 3250.67,2000.67 v1(3252,2002)
  Bottom Layer w10: v1(3252,2002) 3252,2057.72 3492.71,2298.43 3492.71,2357.85 3515.78,2380.92 3515.78,2691.07 3540,2715.28 3540,2715.49 3560,2735.49 3560,2807.21 3562,2809.21 3562,2834.79 3560,2836.79 3560,2907.21 3580,2927.21 3580,3070.64 3626.36,3117 3643.64,3117 3653.64,3127 3653.64,3163.36 ESP0.6
CRG_BUTT: CRG_HEADER.7 ESP0.10 R4.2 | length 948.4
  Top Layer w10: CRG_HEADER.7 3407.41,1954.15 3407.41,2003.41 v1(3408,2004) R4.2
  Bottom Layer w10: v1(3408,2004) 3552.71,2148.71 3552.71,2333 3580,2360.28 3580,2398.92 3600,2418.92 3600,2690.64 3636.36,2727 3636.36,2763.36 ESP0.10
CRG_SWITCH: CRG_HEADER.1 Powerboost.4 | length 1411.9
  Top Layer w10: CRG_HEADER.1 3170.8,1953.76 3170.8,2004.8 v1(3171,2005)
  Bottom Layer w10: v1(3171,2005) 3395,2229 3395,3100 Powerboost.4
D3.3V: "Digital 3.3V Regulator.5" "I2S DAC.1" "I2S DAC.16" "I2S DAC.17" "I2S DAC.20" DAC_C1.2 DAC_C2.2 DREG_C1.2 | length 776
  Top Layer w10: DAC_C1.2 3949.01,3595.72 4030.49,3595.72 4032.8,3598.03 4033.72,3598.03 ; 4101.7,3692.47 4101.5,3692.67 4037.2,3692.67 DREG_C1.2 4037,3601.31 4033.72,3598.03 ; 4220.4,3596.77 4205.71,3582.08 4205.71,3518.95 ; 4259.2,3495.67 4228.99,3495.67 4205.71,3518.95 ; 4259.2,3521.26 4208.02,3521.26 4205.71,3518.95 ; DAC_C2.2 4306.94,3615.55 4289.41,3598.03 4259.2,3598.03 4033.72,3598.03
GND: "Audio AMP.5" "Digital 3.3V Regulator.2" "I2S DAC.3" "I2S DAC.10" "I2S DAC.11" "I2S DAC.12" "I2S DAC.19" AMP_C1.2 AMP_C2.2 CRG_HEADER.2 DAC_C1.1 DAC_C2.1 DAC_C6.2 DAC_C7.1 DREG_C1.1 DREG_C2.1 ESP0.12 ESP0.14 ESP0.17 LEFT_SPEAKER.2 Powerboost.2 Powerboost.5 Powerboost.7 R1.2 R2.2 R3.2 RIGHT_SPEAKER.2 Sensor0.1 Sensor1.1 TIVA.J1_1 TIVA.J1_2 TIVA.J1_3 TIVA.J1_4 TIVA.J1_5 TIVA.J1_6 TIVA.J1_7 TIVA.J1_8 TIVA.J2_1 TIVA.J2_3 TIVA.J2_4 TIVA.J2_5 TIVA.J2_6 TIVA.J2_7 TIVA.J2_8 TIVA.J3_2 TIVA.J3_3 TIVA.J3_4 TIVA.J3_5 TIVA.J3_6 TIVA.J3_7 TIVA.J3_10 TIVA.J4_1 TIVA.J4_2 TIVA.J4_3 TIVA.J4_4 TIVA.J4_5 TIVA.J4_6 TIVA.J4_7 TIVA.J4_8 TIVA.J4_9 TIVA.J4_10 | length 1146.9
  Top Layer w10: R2.2 1543.18,2363.94 1571.09,2391.84 1571.09,2396.09 v1(1573,2398) ; R3.2 1543.18,2710.94 1571.09,2738.84 1571.09,2743.09 v1(1573,2745) ; v2(2502,2009) 2502,1982.79 2512.63,1972.16 Sensor0.1 ; Sensor1.1 2591.46,3731.9 2591.46,3673.54 v2(2592,3673) ; CRG_HEADER.2 3211.98,1955.57 3211.98,2001.98 v2(3214,2004) ; R1.2 3414.73,3224.27 Powerboost.5 ; 4032.8,3367.72 4259.2,3367.72 ; 4259.2,3572.44 4260.46,3573.7 4345.57,3573.7 DAC_C2.1@4349.87,3578
  Top Layer w20: DAC_C1.1 3949,3552.03 DAC_C6.2 ; LEFT_SPEAKER.2 3993.68,1974.16 4018.09,1998.56 4018.09,2005.09 v2(4020,2007) ; DREG_C1.1 4037,3734.72 4041.84,3729.87 4190.3,3729.87 4250.24,3729.87 4255,3734.64 DREG_C2.1 ; RIGHT_SPEAKER.2 4234.55,1974.26 4264,2003.71 v2(4264,2004) ; DAC_C2.1@4349.87,3578 DAC_C2.1 DAC_C2.1@4350,3576
I2S_CLK: DAC_R3.1 ESP0.27 | length 108.1
  Top Layer w10: DAC_R3.1 4440.59,3380.78 4449.37,3372 ESP0.27
I2S_DATA: DAC_R4.1 ESP0.28 | length 123.8
  Top Layer w10: DAC_R4.1 4440.59,3434.81 4449.37,3443.59 4476.21,3443.59 4500,3467.37 4540.37,3467.37 ESP0.28
I2S_WS: DAC_R5.1 ESP0.29 | length 144.5
  Top Layer w10: DAC_R5.1 4440.59,3484.81 4449.37,3493.59 4466.59,3493.59 ESP0.29
LED0: SIGNAL_LED0.1 TIVA.J2_10 | length 1638.1
  Top Layer w10: SIGNAL_LED0.1 1399.26,2402.82 2228.92,3232.48 2228.92,3578.61 2192.45,3615.08 2192.45,3651.55 TIVA.J2_10
LED1: SIGNAL_LED1.1 TIVA.J2_9 | length 1216.8
  Top Layer w10: SIGNAL_LED1.1 1399.26,2745.55 2028.92,3375.21 2028.92,3568.45 2075.55,3615.08 2075.55,3651.55 TIVA.J2_9
"NetAnalog 3.3V Regulator_3": "Analog 3.3V Regulator.3" AREG_R1.1 | length 129.7
  Top Layer w10: AREG_R1.1 4001.83,3253.58 4001.83,3241.54 4024.9,3218.47 4101.7,3218.47
NetDAC_C3_1: "I2S DAC.2" DAC_C3.1 | length 278.3
  Top Layer w10: DAC_C3.1 3891.5,3573.37 3891.5,3596.5 v1(3892,3597) ; 4032.8,3572.44 4033.02,3572.22 4083.78,3572.22 v1(4084,3572)
  Bottom Layer w10: v1(3892,3597) 3917,3572 v1(4084,3572)
NetDAC_C3_2: "I2S DAC.4" DAC_C3.2 | length 270.3
  Top Layer w10: v1(3891,3517) DAC_C3.2 ; 4032.8,3521.26 4032.93,3521.13 4083.87,3521.13 v1(4084,3521)
  Bottom Layer w10: v1(3891,3517) 4078.65,3517 4082.65,3521 v1(4084,3521)
NetDAC_C6_1: "I2S DAC.5" DAC_C6.1 | length 85.4
  Top Layer w10: DAC_C6.1 3950.97,3491.87 3954.76,3495.67 4032.8,3495.67
NetDAC_C7_2: "I2S DAC.18" DAC_C7.2 | length 151.6
  Top Layer w10: 4259.2,3546.85 4260.46,3545.59 4402.44,3545.59 DAC_C7.2
NetDAC_R1_1: "I2S DAC.7" DAC_R1.1 | length 200.5
  Top Layer w10: DAC_R1.1 3869.84,3461.87 3887.23,3444.49 4032.8,3444.49
NetDAC_R2_1: "I2S DAC.6" DAC_R2.1 | length 259.7
  Top Layer w10: DAC_R2.1 3862.13,3497.87 3891,3469 3965.06,3469 3966.13,3470.08 4032.8,3470.08
NetDAC_R3_2: "I2S DAC.13" DAC_R3.2 | length 146
  Top Layer w10: 4259.2,3418.9 4316.9,3418.9 4354.92,3380.87 DAC_R3.2
NetDAC_R4_2: "I2S DAC.14" DAC_R4.2 | length 135.8
  Top Layer w10: 4259.2,3444.49 4329.1,3444.49 4342.72,3430.87 DAC_R4.2
NetDAC_R5_2: "I2S DAC.15" DAC_R5.2 | length 135.9
  Top Layer w10: 4259.2,3470.08 4380.63,3470.08 4389.41,3478.86 DAC_R5.2
"NetDigital 3.3V Regulator_3": "Digital 3.3V Regulator.3" DREG_R1.1 | length 129.4
  Top Layer w10: 4190.3,3767.27 4267.1,3767.27 4290.17,3744.2 4290.17,3732.43 DREG_R1.1
NetR2_1: R2.1 SIGNAL_LED0.2 | length 112.9
  Top Layer w10: SIGNAL_LED0.2 1488.55,2363.45 R2.1
NetR3_1: R3.1 SIGNAL_LED1.2 | length 111.8
  Top Layer w10: SIGNAL_LED1.2 1491.18,2706.18 R3.1
SPEAKER_L: AMP_RES1.2 LEFT_SPEAKER.1 | length 107.5
  Top Layer w20: AMP_RES1.2 3954.32,2059.68 LEFT_SPEAKER.1
SPEAKER_R: AMP_RES2.2 RIGHT_SPEAKER.1 | length 99.3
  Top Layer w20: RIGHT_SPEAKER.1 4195.59,1955.97 4195.59,2054.13 AMP_RES2.2
VBAT: ESP0.3 R0.2 R1.1 | length 456.9
  Top Layer w10: R0.2@3388,3293.41 3384.06,3293.41 3355.28,3322.19 3355.28,3364.58 3462.7,3472 ESP0.3
  Top Layer w20: R1.1 R0.2@3388,3293.41
VDistance0: Sensor0.3 TIVA.J3_8 | length 670.2
  Top Layer w20: TIVA.J3_8 2033.92,1910.08 2204.52,1910.08 2211.65,1902.94 2572.1,1902.94 2589.56,1920.41 2589.56,1951.65 Sensor0.3
VDistance1: Sensor1.3 TIVA.J3_9 | length 2121.3
  Top Layer w20: TIVA.J3_9 2084,2230 2137,2283 2274,2283 v1(2279,2288) ; v1(2212,2462) 2273,2462 2512.18,2701.18 Sensor1.3
  Bottom Layer w20: v1(2212,2462) 2279,2395 v1(2279,2288)
pads on no net: "+5V to -5V.5" "Analog 3.3V Regulator.4" "Audio AMP.7" "Digital 3.3V Regulator.4" CRG_HEADER.MP1 CRG_HEADER.MP2 ESP0.4 ESP0.5 ESP0.11 ESP0.13 ESP0.16 ESP0.18 ESP0.19 ESP0.20 ESP0.25 ESP0.26 ESP0.30 LEFT_SPEAKER.3 LEFT_SPEAKER.4 Powerboost.1 Powerboost.6 RIGHT_SPEAKER.3 RIGHT_SPEAKER.4 Sensor0.MP1 Sensor0.MP2 Sensor1.MP1 Sensor1.MP2 SIGNAL_LED0.3 SIGNAL_LED0.4 SIGNAL_LED1.3 SIGNAL_LED1.4 TIVA.J1_9 TIVA.J1_10

## Polygon pours and split planes (outlines as drawn)
AGND on Top Layer "NONET_L-01_P-001" (solid, remove dead copper, pour order 6): 3723.98,3409.87 3729.86,3404 4087,3404 4087,3363 4176,3274 4284,3274 4284,3221 4178,3115 4011,3115 3977,3081 3977,2703 3706,2703 3705,2704
GND on Top Layer "NONET_L-01_P-001" (solid, pour order 8): 4224,2895 4467,2895 4470,2898 4470,3007 4224,3007 4223,3008
GND on Top Layer "NONET_L-01_P-001" (solid, pour order 3): 3926,3794 3933,3787 3933,3511 4442,3511 4440,3532 4442,3576 4442,3810
GND on Top Layer "NONET_L-01_P-001" (solid, pour order 4): 4168,3512 4168,3345 4177,3354 4348,3354 4348,3506 4356,3514
GND on Bottom Layer "NONET_L-01_P-001" (solid, pour order 9): 4597,1752 1185,1752 1185,3932 4597,3932

## Keep-outs
Top Layer:
  the board outline again, w10

## Text inside footprints (layer, text, board x,y; h text height)
"+5V to -5V": Top Overlay "*" at 2714.05,2341 h20; Mechanical 13 "*" at 2764.05,2341 h20
"Audio AMP": Top Overlay "*" at 4295.5,2700 h20 r180; Mechanical 13 "*" at 4295.5,2700 h20 r180